# Altium PCB MergeBoard.PcbDoc
Units mil, origin at the board's own origin, x right, y up, seen from the top; angles counter-clockwise.
Board outline 4000 x 4000 mil, 4 copper layers (Top Layer, Mid-Layer 1, Mid-Layer 2, Bottom Layer); 113 components, 68 nets, 365 pads, 27 vias.
Unrouted connection lines stored in the file: 160.
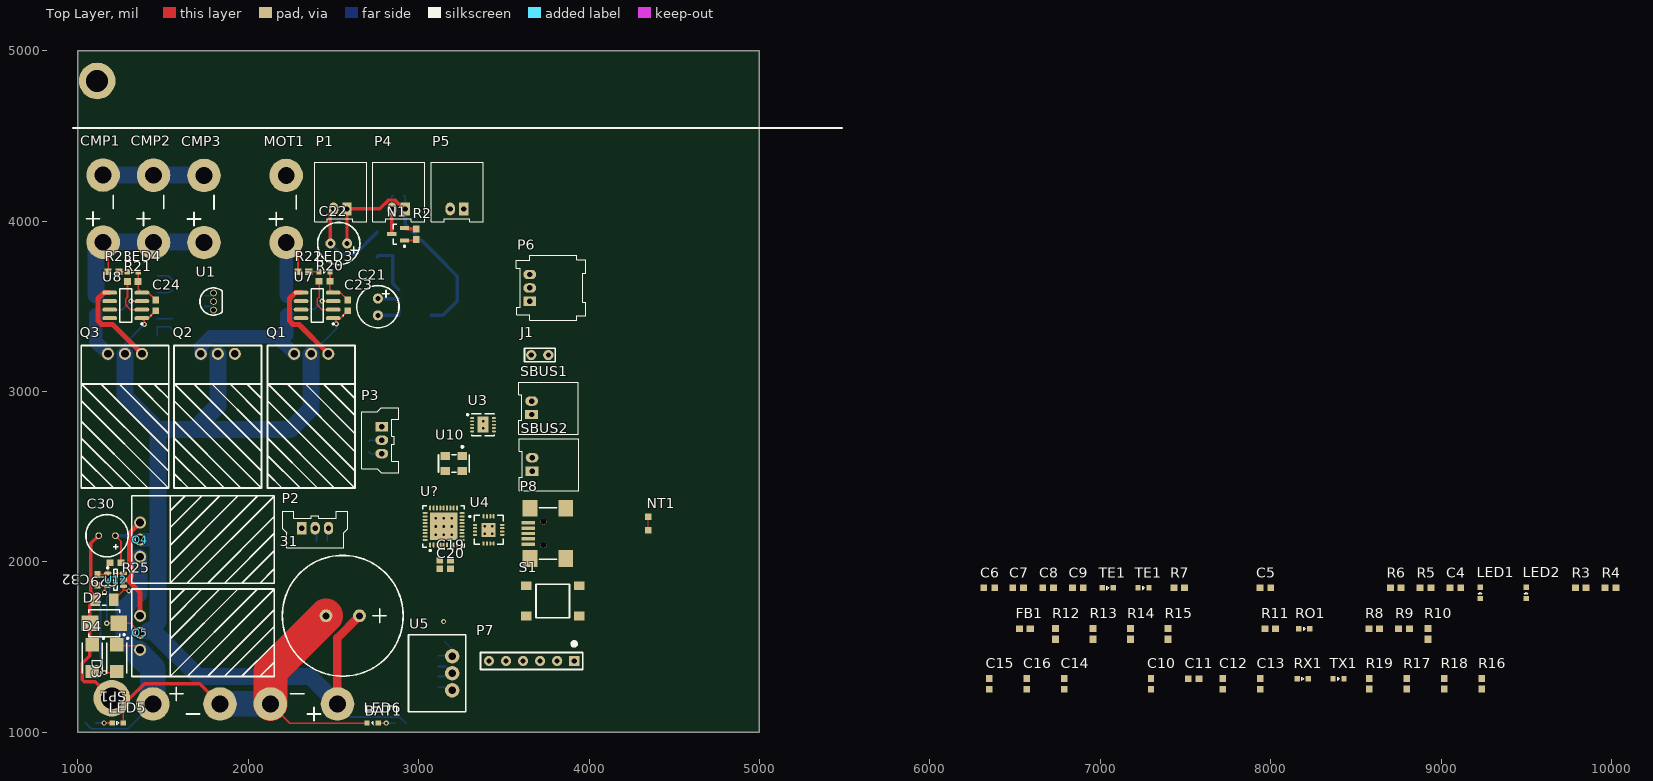
[diagram p0: Top Layer view]
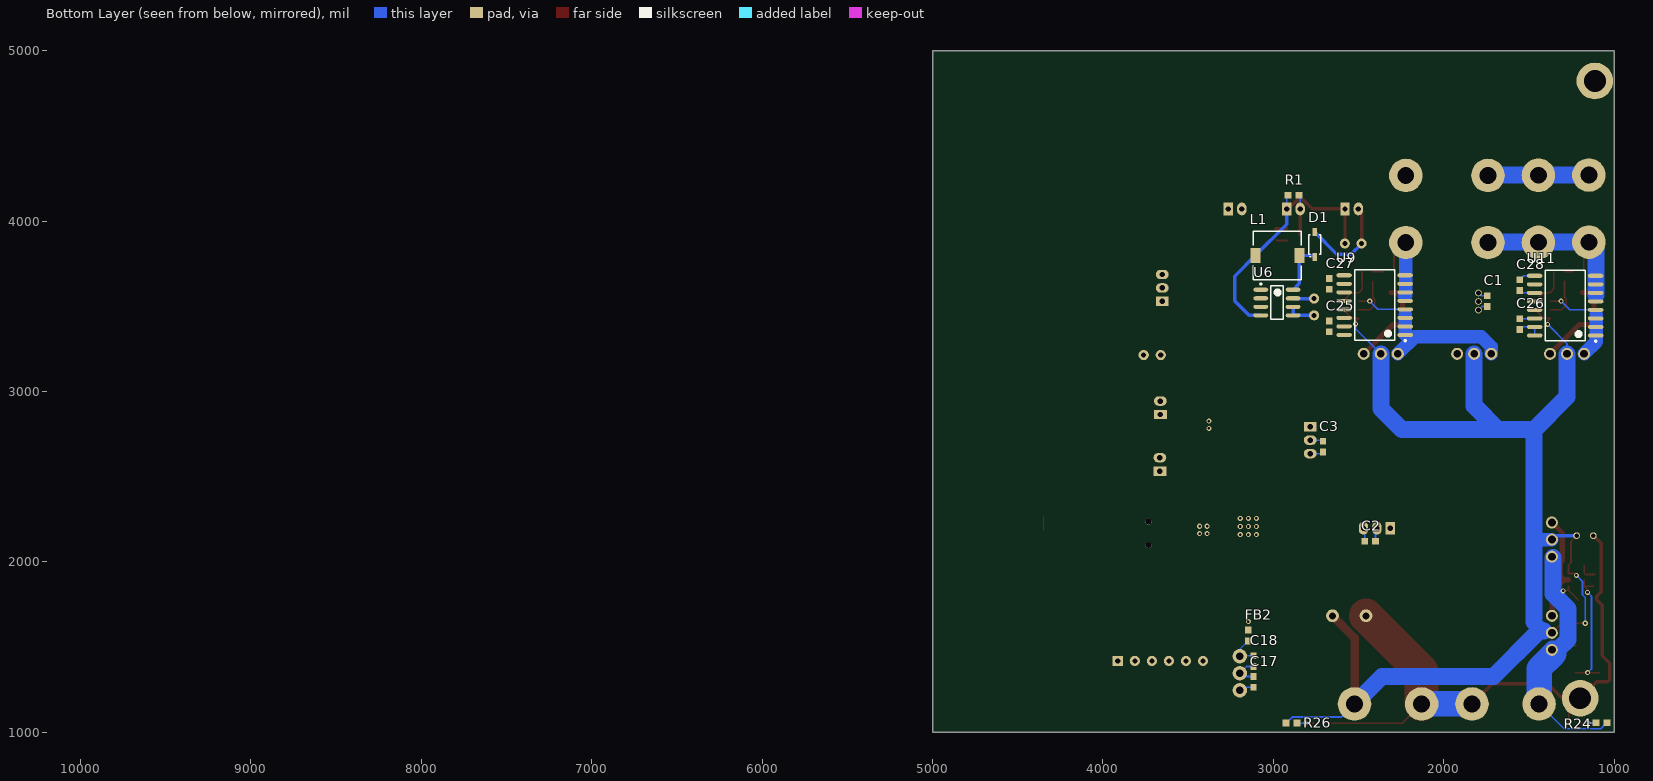
[diagram p1: Bottom Layer view, seen from below]

## Layer stack, top to bottom
Top Layer: signal copper 1.4
Dielectric: core 12.6, FR-4, Dk 4.8
Mid-Layer 1: signal copper 1.4
Dielectric: prepreg 12.6, FR-4, Dk 4.8
Mid-Layer 2: signal copper 1.4
Dielectric: core 12.6, FR-4, Dk 4.8
Bottom Layer: signal copper 1.4

## Board outline
1000,1000 5000,1000 5000,5000 1000,5000

## Design rules (kind name [scope] priority, off if disabled: settings)
Clearance [All] p1: gap=7
HoleSize [All] p1: absolutevalues=TRUE maxlimit=200 minlimit=15 maxpercent=80.000 minpercent=20.000
PolygonConnect [All] p1: connectstyle=Relief reliefconductorwidth=10 reliefentries=4 polygonreliefangle="90 Angle" airgapwidth=10
RoutingVias [All] p1: holewidth=15 width=30 viastyle="Through Hole" minholewidth=15 minwidth=30 maxholewidth=28 maxwidth=50
SilkscreenOverComponentPads SilkToSolderMaskClearance [IsPad] p1: minsilkscreentomaskgap=10
SolderMaskExpansion Blob [InNetClass('Blob')] p1: expansion=-3
SolderMaskExpansion [All] p2: expansion=3
Width [All] p1: maxlimit=200 minlimit=7 preferedwidth=7
26 further rules are at their usual default settings.

## Classes and differential pairs
component class Attachments: C1 C2 C3 N1 P1 P2 P3 P4 P5 P6 R1 R2 U1
component class CPU: C4 C5 C6 C7 C8 C9 C10 C11 C12 C13 C14 C15 C16 FB1 J1 LED1 LED2 P7 P8 R3 R4 R5 R6 R7 R8 R9 R10 R11 R12 R13 R14 R15 R16 R17 R18 R19 RO1 RX1 S1 SBUS1 SBUS2 TE1 TX1 U3 U4 U10 U?
component class PowerSplitter: C23 C24 C25 C26 C27 C28 CMP1 CMP2 CMP3 LED3 LED4 MOT1 Q1 Q2 Q3 R20 R21 R22 R23 U7 U8 U9 U11
component class Power: C17 C18 C19 C20 C21 C22 D1 FB2 L1 NT1 U5 U6
component class "Rail Station": 31 BAT1 C29 C30 C32 D2 D3 D4 LED5 LED6 Q4 Q5 R24 R25 R26 SP1 U12
net class Blob: MOTORS MT_PW RAIL+ SHORE+

## Components (designator, comment, footprint, x,y, rotation, side; value= is the part's Value field where it differs from the comment)
31 "CapPol" CAP1000uF 2555,1684 r180 top
BAT1 "BATWIRE" BATWIRE12 2524,1167 r180 top
C1 "Cap" CAPC0603 1745,3530 r270 bottom
C2 "Cap" CAPC0603 2432,2122 r180 bottom
C3 "Cap" CAPC0603 2709,2676 r90 bottom
C4 "Cap" CAPC0603 9083,1848 r0 top
C5 "Cap" CAPC0603 7968,1848 r0 top
C6 "Cap" CAPC0603 6348,1848 r0 top
C7 "Cap" CAPC0603 6518,1848 r0 top
C8 "Cap" CAPC0603 6693,1848 r0 top
C9 "Cap" CAPC0603 6868,1848 r0 top
C10 "Cap" CAPC0603 7297,1285 r90 top
C11 "Cap" CAPC0603 7547,1315 r0 top
C12 "Cap" CAPC0603 7717,1285 r90 top
C13 "Cap" CAPC0603 7937,1285 r90 top
C14 "Cap" CAPC0603 6787,1285 r90 top
C15 "Cap" CAPC0603 6347,1285 r90 top
C16 "Cap" CAPC0603 6567,1285 r90 top
C17 "Cap" CAPC0603 3117,1296 r90 bottom
C18 "Cap" CAPC0603 3117,1418 r270 bottom
C19 "Cap" CAPC0603 3156,2010 r0 top
C20 "Cap" CAPC0603 3156,1961 r0 top
C21 "CapPol" ELXZ500ELL680MF15D 2761,3545 r270 top
C22 "CapPol" UPW1E121MED 2581,3868 r180 top
C23 "CapPol" CAPP0603 2585,3505 r90 top
C24 "CapPol" CAPP0603 1457,3505 r90 top
C25 "Cap" CAPC0603 2672,3382 r270 bottom
C26 "Cap" CAPC0603 1555,3395 r270 bottom
C27 "Cap" CAPC0603 2673,3632 r90 bottom
C28 "Cap" CAPC0603 1555,3624 r90 bottom
C29 "Cap" CAPC1206 1157,1777 r180 top
C30 "CapPol" CAP22uF100V 1172,2154 r180 top
C32 "Cap" CAPC0603 1116,1895 r270 top
CMP1 "BATWIRE" BATWIRE12 1149,3876 r90 top
CMP2 "BATWIRE" BATWIRE12 1445,3875 r90 top
CMP3 "BATWIRE" BATWIRE12 1741,3874 r90 top
D1 "Schottky" 1N5819HW-7-F 2758,3863 r90 bottom
D2 "SMBJ60A-13-F" SMBJ60A-13-F 1156,1640 r180 top
D3 "SS16T3G" SS16T3G 1228,1436 r270 top
D4 "SS16T3G" SS16T3G 1086,1436 r270 top
FB1 "FBead" RES0603 6557,1608 r0 top
FB2 "FBead" RES0603 3147,1568 r270 bottom
J1 "Jumper" HEADER_MALE_1X2 3661,3214 r0 top
L1 "Inductor" SLF7045T-101MR50-PF 2977,3798 r0 bottom
LED1 "LED" LED0603 9228,1818 r90 top
LED2 "LED" LED0603 9498,1818 r90 top
LED3 "LED" LED0603 2448,3703 r0 top
LED4 "LED" LED0603 1323,3703 r0 top
LED5 "LED" LED0603 1235,1055 r0 top
LED6 "LED" LED0603 2730,1055 r180 top
MOT1 "BATWIRE" BATWIRE12 2223,3874 r90 top
N1 "NMOSFET" 2N7002P,215 2880,3923 r180 top
NT1 "NetTie" NT_5mil 4348,2226 r90 top net-tie
P1 "2-pin Horz Sherlock" MOLEX-HDR-1X2-SHERLOCK-HORZ 2580,4071 r0 top
P2 "MOLEX-HDR-1x3-SHERLOCK_VERT" MOLEX-HDR-1X3-SHERLOCK-VERT 2314,2198 r180 top
P3 "MOLEX-HDR-1x3-SHERLOCK_VERT" MOLEX-HDR-1X3-SHERLOCK-VERT 2784,2793 r90 top
P4 "2-pin Horz Sherlock" MOLEX-HDR-1X2-SHERLOCK-HORZ 2922,4071 r0 top
P5 "2-pin Horz Sherlock" MOLEX-HDR-1X2-SHERLOCK-HORZ 3264,4071 r0 top
P6 "3pos RA sherlock connector" MOLEX-HDR-1X3-SHERLOCK-RA 3652,3529 r270 top
P7 "SWD" SWD_STM32 3913,1419 r270 top
P8 "UX60-MB-5ST" UX60-MB-5ST 3733,2167 r90 top
Q1 "IRFB3306PbF" "TO-220AB Heatsink" 2370,3221 r180 top
Q2 "IRFB3306PbF" "TO-220AB Heatsink" 1822,3221 r180 top
Q3 "IRFB3306PbF" "TO-220AB Heatsink" 1277,3221 r180 top
Q4 "IRFB3306PbF" "TO-220AB Heatsink" 1366,2131 r270 top
Q5 "IRFB3306PbF" "TO-220AB Heatsink" 1366,1584 r270 top
R1 "Res" RES0603 2882,4152 r180 bottom
R2 "Res" RES0603 2986,3923 r90 top
R3 "Res" RES0603 9818,1848 r0 top
R4 "Res" RES0603 9993,1848 r0 top
R5 "Res" RES0603 8908,1848 r0 top
R6 "Res" RES0603 8733,1848 r0 top
R7 "Res" RES0603 7463,1848 r0 top
R8 "Res" RES0603 8607,1608 r0 top
R9 "Res" RES0603 8782,1608 r0 top
R10 "Res" RES0603 8922,1578 r90 top
R11 "Res" RES0603 7997,1608 r0 top
R12 "Res" RES0603 6737,1578 r90 top
R13 "Res" RES0603 6957,1578 r90 top
R14 "Res" RES0603 7177,1578 r90 top
R15 "Res" RES0603 7397,1578 r90 top
R16 "Res" RES0603 9237,1285 r90 top
R17 "Res" RES0603 8797,1285 r90 top
R18 "Res" RES0603 9017,1285 r90 top
R19 "Res" RES0603 8577,1285 r90 top
R20 "Res" RES0603 2448,3646 r0 top
R21 "Res" RES0603 1323,3645 r0 top
R22 "Res" RES0603 2324,3702 r0 top
R23 "Res" RES0603 1210,3703 r0 top
R24 "Res" RES0603 1075,1056 r0 bottom
R25 "Res" RES0603 1222,1996 r180 top
R26 "Res" RES0603 2894,1055 r180 bottom
RO1 "LED" LED0603 8197,1608 r0 top
RX1 "LED" LED0603 8187,1315 r0 top
S1 "Button" PTS645xxxxSMTR92 3787,1771 r180 top
SBUS1 "2-pin Horz Sherlock" MOLEX-HDR-1X2-SHERLOCK-HORZ 3663,2865 r270 top
SBUS2 "2-pin Horz Sherlock" MOLEX-HDR-1X2-SHERLOCK-HORZ 3666,2533 r270 top
SP1 "BATWIRE" BATWIRE12 1441,1167 r0 top
TE1 "LED" LED0603 7043,1848 r0 top
TE1 "LED" LED0603 7253,1848 r0 top
TX1 "LED" LED0603 8397,1315 r0 top
U1 "MCP9701" MCP970x-E/TO 1797,3528 r90 top
U3 "ISL3179EFRZ" ISL3179EFRZ 3378,2805 r0 top
U4 "FT230XQ-T" FT230XQ-T 3411,2188 r0 top
U5 "R-78C3.3-1.0" R-78C3.3-1.0 3197,1247 r90 top
U6 "LM2594M-12/NOPB" LM2594M-12/NOPB 2979,3522 r180 bottom
U7 "MIC5011" MIC5011 2405,3505 r180 top
U8 "MIC5011" MIC5011 1282,3505 r180 top
U9 "ACS710" ACS710 2406,3507 r0 bottom
U10 "636L3C008M" 636L3C 3207,2577 r180 top
U11 "ACS710" ACS710 1288,3504 r0 bottom
U12 "LM5050-1" LM5050 1222,1895 r0 top
U? "STM32F103TBU6" STM32F103TBU6 3147,2208 r90 top

## Footprints (in the part's own frame and the unit in brackets; to place one, negate y for a bottom-side part, rotate by r counter-clockwise, add the part's x,y. Pads: shape width x height; smd on the part's side, far side on the other; paste and mask are expansions set on the pad)
1N5819HW-7-F [mm] "DIODE SCHOTTKY 40V 1A SOD123"
  rect 1.2x0.7 smd: A(1.85,0) C(-1.85,0)
  silkscreen extent -1.9,-0.9 1.45,0.9, body extent -1.42,-0.85 1.43,0.85, height 1.35
2N7002P,215 [mm] "MOSFET N-CH SGL 60V SOT-23"
  rect 1.4x0.6 smd: 1(-0.95,0.95) 2(-0.95,-0.95) 3(0.95,0)
  silkscreen extent -1.08,-1.5 0.7,1.92, body extent -0.7,-1.5 0.7,1.5, height 1.1
636L3C [mm]
  rect 1.4x1.2 smd: 1(-1.27,-1.1) 2(1.27,-1.1) 3(1.27,1.1) 4(-1.27,1.1)
  silkscreen extent -2.3,-2.65 2.3,1.3
ACS710 [mm] "SOIC, 16-Leads, Body 10.5x7.6mm (max), Pitch 1.27mm, IPC Medium Density"
  oval 2.3x0.6 smd: 1(-4.55,4.445) 2(-4.55,3.175) 3(-4.55,1.905) 4(-4.55,0.635) 5(-4.55,-0.635) 6(-4.55,-1.905) 7(-4.55,-3.175) 8(-4.55,-4.445) 9(4.55,-4.445) 10(4.55,-3.175) 11(4.55,-1.905) 12(4.55,-0.635) 13(4.55,0.635) 14(4.55,1.905) 15(4.55,3.175) 16(4.55,4.445)
  silkscreen extent -4.67,-5.25 3,5.42, body extent -3.8,-5.25 3.8,5.25, height 2.65
BATWIRE12 [mm] "Two 12AWG wires soldered directly to the board"
  round 5 hole 2.5: +(0,0) -(10,0)
  silkscreen extent 2.5,-1.5 7,2.5
CAP22uF100V [mm] "CAP ALUM 22UF 100V 20% RADIAL"
  round 1 hole 0.65: 1(-1.25,0) 2(1.25,0)
  silkscreen extent -3.15,-3.15 3.15,3.15, body extent -3.12,-3.14 3.15,3.14, height 11.2
CAP1000uF [mm] "CAP ALUM 1000UF 50V 20% RADIAL"
  round 1.9 hole 1.05: 1(-2.5,0) 2(2.5,0)
  silkscreen extent -9,-9 9,9, body extent -8.93,-8.98 9,8.98, height 20
CAPC0603 [mm] "Chip Capacitor, 2-Leads, Body 1.60x0.80mm, IPC Medium Density"
  rect 1x0.95 smd: 1(-0.8,0) 2(0.8,0)
  body extent -0.88,-0.48 0.87,0.48, height 0.8
CAPC1206 [mm] "Chip Capacitor, 2-Leads, Body 3.20x1.60mm, IPC Medium Density"
  rect 1.4x1.85 smd: 1(-1.4,0) 2(1.4,0)
  silkscreen extent -0.3,-0.82 0.3,0.82, body extent -1.7,-0.9 1.7,0.9, height 1.8
CAPP0603 [mm] "Chip Capacitor, 2-Leads, Body 1.60x0.80mm, IPC Medium Density"
  rect 1x0.95 smd: 1(-0.8,0) 2(0.8,0)
  silkscreen extent -1.56,0.64 -1.46,0.74, body extent -0.88,-0.48 0.87,0.48, height 0.8
ELXZ500ELL680MF15D [mm] "CAP ALUM 68UF 50V 20% RADIAL"
  round 1.5 hole 0.75: 1(0,0) 2(2.5,0)
  silkscreen extent -1.95,-3.15 4.35,3.15, body extent -1.93,-3.14 4.35,3.14, height 15
FT230XQ-T [mm] "IC USB SERIAL BASIC UART 16QFN"
  oval 0.65x0.3 smd mask+0.07: 1(-2.025,0.75) 2(-2.025,0.25) 3(-2.025,-0.25) 4(-2.025,-0.75) 9(2.025,-0.75) 10(2.025,-0.25) 11(2.025,0.25) 12(2.025,0.75)
  oval 0.3x0.65 smd mask+0.07: 5(-0.75,-2.025) 6(-0.25,-2.025) 7(0.25,-2.025) 8(0.75,-2.025) 13(0.75,2.025) 14(0.25,2.025) 15(-0.25,2.025) 16(-0.75,2.025)
  rect 2.08x2.08 smd mask+0.07: 13(0,0)
  silkscreen extent -2.92,-2.15 2.15,2.15, body extent -2,-2 2,2, height 0.8
HEADER_MALE_1X2 [mil]
  round 60 hole 30: 1(0,0) 2(100,0)
  silkscreen extent -40,-40 140,40
ISL3179EFRZ [mm] "TXRX ESD 3.3V RS-485/422 10-DFN"
  oval 0.6x0.25 smd mask+0.07: 1(-1.615,1) 2(-1.615,0.5) 3(-1.615,0) 4(-1.615,-0.5) 5(-1.615,-1) 6(1.615,-1) 7(1.615,-0.5) 8(1.615,0) 9(1.615,0.5) 10(1.615,1)
  rect 1.64x2.38 smd mask+0.07: 11(0,0)
  silkscreen extent -2.42,-1.65 1.65,1.65, body extent -1.5,-1.5 1.5,1.5, height 0.9
LED0603 [mm] "Chip LED, 2-Leads, Body 1.60x0.80mm, IPC Medium Density"
  rect 0.8x0.8 smd: A(-0.825,0) C(0.825,0)
  silkscreen extent -0.13,-0.25 0.12,0.25, body extent -0.88,-0.48 0.87,0.47, height 0.8
LM2594M-12/NOPB [mm] "IC REG BUCK 12V 0.5A 8-SOIC"
  oval 2.2x0.6 smd: 1(-2.4,1.905) 2(-2.4,0.635) 3(-2.4,-0.635) 4(-2.4,-1.905) 5(2.4,-1.905) 6(2.4,-0.635) 7(2.4,0.635) 8(2.4,1.905)
  silkscreen extent -2.53,-2.5 0.9,2.88, body extent -2,-2.5 2,2.5, height 1.75
LM5050 [mm] "SOT23, 6-Leads, Body 2.90x2.80mm, Pitch 0.95mm, IPC Medium Density"
  oval 1.1x0.6 smd: 1(-1.175,0.95) 2(-1.175,0) 3(-1.175,-0.95) 4(1.175,-0.95) 5(1.175,0) 6(1.175,0.95)
  silkscreen extent -1.3,-1.55 0.25,1.92, body extent -0.87,-1.52 0.88,1.53, height 1.1
MCP970x-E/TO [mm] "Low-Power Linear Active Thermistor ICs"
  round 1 hole 0.8: 1(-1.27,0) 2(0,0) 3(1.27,0)
  silkscreen extent -2.03,-1.31 2.03,2.03, body extent -2.33,-2.35 2.35,2.35, height 5.3
MIC5011 [mm] "SOIC, 8-Leads, Body 4.90x3.90mm, Pitch 1.27mm, IPC Medium Density"
  oval 2.2x0.6 smd: 1(-2.4,1.905) 2(-2.4,0.635) 3(-2.4,-0.635) 4(-2.4,-1.905) 5(2.4,-1.905) 6(2.4,-0.635) 7(2.4,0.635) 8(2.4,1.905)
  silkscreen extent -2.53,-2.5 0.9,2.88, body extent -2,-2.5 2,2.5, height 1.63
MOLEX-HDR-1X2-SHERLOCK-HORZ [mm]
  rect 1.397x1.905 hole 0.8: 1(0,0)
  oval 1.397x1.905 hole 0.8: 2(-2,0)
  silkscreen extent -4.83,-1.91 2.92,6.98, body extent -4.83,-1.91 2.87,8.59, height 5.54
MOLEX-HDR-1X3-SHERLOCK-RA [mm]
  rect 1.397x1.905 hole 0.8: 1(0,0)
  oval 1.397x1.905 hole 0.8: 2(-2,0) 3(-4,0)
  silkscreen extent -6.86,-2.03 2.79,8.38, body extent -6.88,-1.99 2.82,8.51, height 5.75
MOLEX-HDR-1X3-SHERLOCK-VERT [mm]
  rect 1.397x1.905 hole 0.8: 1(0,0)
  oval 1.397x1.905 hole 0.8: 2(-2,0) 3(-4,0)
  silkscreen extent -6.85,-2.55 2.85,2.95, body extent -6.88,-2.57 2.82,2.98, height 8.57
NT_5mil [mm] "Thin Net Tie"
  rect 1x1 smd paste+0 mask+0: 1(-1,0) 2(1,0)
  Top Layer lines w0.127: -1,0 1,0
PTS645xxxxSMTR92 [mm] "PTS645 Series SMT 6 mm Tactile Switch"
  rect 1.555x1.3 smd: A(-3.975,2.25) A(3.975,2.25) B(-3.975,-2.25) B(3.975,-2.25)
  silkscreen extent -2.5,-2.5 2.5,2.5, body extent -3,-3 3,3, height 4.5
R-78C3.3-1.0 [mm] "CONV DC/DC 1A 3.3V OUT SIP VERT"
  round 2.15 hole 1.15: 1(0,0) 2(2.54,0) 3(5.08,0)
  silkscreen extent -3.21,-2 8.29,6.5, body extent -3.3,-2.03 8.38,6.6, height 10.4
RES0603 [mm] "Chip Resistor, 2-Leads, Body 1.60x0.80mm, IPC Medium Density"
  rect 1.05x1 smd: 1(-0.8,0) 2(0.8,0)
  body extent -0.88,-0.48 0.87,0.47, height 0.8
SLF7045T-101MR50-PF [mm] "INDUCTOR SHIELD PWR 100UH 7045"
  rect 1.5x2.2 smd: 1(-3.275,0) 2(3.275,0)
  silkscreen extent -3.6,-3.6 3.6,3.6, body extent -3.6,-3.6 3.6,3.6, height 4.8
SMBJ60A-13-F [mm] "TVS UNIDIRECT 600W 60V SMB"
  rect 2.5x2.3 smd: A(2.15,0) C(-2.15,0)
  silkscreen extent -3.08,-2 2.3,2, body extent -2.29,-1.97 2.28,1.97, height 2.62
SS16T3G [mm] "DIODE SCHOTTKY 60V 1A SMA"
  rect 2x2 smd: A(2,0) C(-2,0)
  silkscreen extent -3.07,-1.5 2.3,1.78, body extent -2.29,-1.46 2.28,1.46, height 2.2
STM32F103TBU6 [mm] "MCU ARM 32BIT 128KB 36VFQFPN"
  oval 0.75x0.3 smd mask+0.07: 1(-2.75,2) 2(-2.75,1.5) 3(-2.75,1) 4(-2.75,0.5) 5(-2.75,0) 6(-2.75,-0.5) 7(-2.75,-1) 8(-2.75,-1.5) 9(-2.75,-2) 19(2.75,-2) 20(2.75,-1.5) 21(2.75,-1) 22(2.75,-0.5) 23(2.75,0) 24(2.75,0.5) 25(2.75,1) 26(2.75,1.5) 27(2.75,2)
  oval 0.3x0.75 smd mask+0.07: 10(-2,-2.75) 11(-1.5,-2.75) 12(-1,-2.75) 13(-0.5,-2.75) 14(0,-2.75) 15(0.5,-2.75) 16(1,-2.75) 17(1.5,-2.75) 18(2,-2.75) 28(2,2.75) 29(1.5,2.75) 30(1,2.75) 31(0.5,2.75) 32(0,2.75) 33(-0.5,2.75) 34(-1,2.75) 35(-1.5,2.75) 36(-2,2.75)
  rect 4.1x4.1 smd mask+0.07: 37(0,0)
  silkscreen extent -3.7,-3.1 3.1,3.1, body extent -3.06,-3.06 3.06,3.06, height 1
SWD_STM32 [mil] "SWD connector matching the pinout on STM Discovery Boards"
  rect 60x60 hole 30: 1(0,0)
  round 60 hole 30: 2(0,-100) 3(0,-200) 4(0,-300) 5(0,-400) 6(0,-500)
  silkscreen extent -110,-550 50,50
"TO-220AB Heatsink" [mm] "HEXFET Power MOSFET w/ Heat Sink"
  round 1.8 hole 1.15: D(0,0) G(-2.54,0) S(2.54,0)
  silkscreen extent -6.53,-1.25 6.52,20, body extent -6.44,-0.15 6.36,19.9, height 12.7
UPW1E121MED [mm] "CAP ALUM 120UF 25V 20% RADIAL"
  round 1.5 hole 0.75: 1(0,0) 2(2.5,0)
  silkscreen extent -1.9,-3.15 4.4,3.15, body extent -1.92,-3.14 4.35,3.14, height 15
UX60-MB-5ST [mm] "USB Mini-B Recepticle"
  rect 0.5x2 smd: 1(-1.6,2.25) 2(-0.8,2.25) 3(0,2.25) 4(0.8,2.25) 5(1.6,2.25)
  rect 2.5x2.2 smd: SHD(-3.75,-3.3) SHD(-3.75,2) SHD(3.75,-3.3) SHD(3.75,2)
  round 0.9 hole 0.9 unplated: ""(-1.75,0) ""(1.75,0)
  silkscreen extent -3.85,-1.92 3.85,0.63

## Part data
BAT1 CMP1 CMP2 CMP3 MOT1 SP1: "Two large gauge leads soldered directly to the board."
D1: "Schottky Diode Template"
D2: "TVS UNIDIRECT 600W 60V SMB"
D3 D4: "DIODE SCHOTTKY 60V 1A SMA"
FB1 FB2: "Ferrite Bead"
J1: "Single Jumper on 1x2 Male Header"
N1: "NMOSFET Template"
NT1: "Ties two nets together"
P1 P4 P5 SBUS1 SBUS2: library part MOLEX-HDR-1x2-SHERLOCK_RA, "Header, Molex, 2mm Pitch Sherlock Header, Single Row, Horizontal, 2 Circuits, Length 3.3mm,  0353630260"
P2 P3: "Header, Molex, 2mm Pitch Sherlock Header, Single Row, Vertical, 3 Circuits, Length 3.3mm, 0353620376"
P6: library part MOLEX-HDR-1x3-SHERLOCK_RA, "Header, Molex, 2mm Pitch Sherlock Header, Single Row, Right Angle 3 Circuits, Length 3.3mm"
P7: library part SWD_STM32, "SWD connector matching the pinout on STM Discovery Boards"
P8: "USB Mini B Metal Shield SMT Type With Positioning Post"
Q1 Q2 Q3 Q4 Q5: library part IRFx3306PbF, "HEXFET Power MOSFET"
S1: "SPST Button"
U1: library part MCP970x, "Low-Power Linear Active Thermistor ICs"
U3: "TXRX ESD 3.3V RS-485/422 10-DFN"
U4: "IC USB SERIAL BASIC UART 16QFN"
U5: "CONV DC/DC 1A 3.3V OUT SIP VERT"
U6: "IC REG BUCK 12V 0.5A 8-SOIC"
U7 U8: "Minimum Parts High- or Low-Side MOSFET Driver"
U9 U11: "Current Sensor with Integrated Overcurrent Detection"
U10: library part 636L3C, "HCMOS/TTL Clock Oscillator"
U12: library part LM5050, "High-Side OR-ing FET Controller"
U?: "MCU ARM 32BIT 32K FLASH 36VFQFP"

## Free pads (board coordinates)
  round 215 hole 128.5: 1(1114,4822) 1(1200,1200)

## Via types
v1: diameter 30, hole 15, Top Layer to Bottom Layer, tented both sides, 11 vias
v2: diameter 30, hole 15, Top Layer to Bottom Layer, tented top, 10 vias
v3: diameter 30, hole 15, Top Layer to Bottom Layer, 6 vias

## Nets (pads, with @x,y where several pads share a name; then routed paths per layer and width w, separated by ;. In a path a pad name is that pad's centre, name@x,y a point inside that pad or via, vN(x,y) a via of type N, cw(c..) or ccw(c..) an arc to the next point about the centre after c; other vN are vias at no path point)
3V3: C1.2 C2.2 C3.2 C4.2 C6.1 C7.1 C8.1 C9.1 C16.1 C18.1 FB2.2 P2.2 P3.2 P6.1 P7.1 R3.1 R4.1 R6.1 R12.1 R13.1 R14.1 R15.1 U1.1 U3.10 U5.3 U10.1 U10.4 U?.1 U?.19 U?.27 | length 408.8
  Bottom Layer w7: FB2.2 3197,1486.5 U5.3 U5.3@3194.5,1449.5
  Bottom Layer w10: C1.2 1776.5,3498.5 U1.1 ; P2.2 2400.5,2190.24 C2.2 ; C3.2 2715.76,2714.26 P3.2 ; C18.1 U5.3@3194.5,1449.5
12V: C22.1 L1.2 P1.1 P4.1 R1.1 U6.4 | length 1528.1
  Top Layer w20: C22.1 2580,3869 P1.1 2773.16,4071 2825.66,4123.5 2860.86,4123.5 2913.36,4071 P4.1
  Bottom Layer w10: R1.1 2922,4143.5 P4.1
  Bottom Layer w20: P4.1 2922,3981.94 L1.2 3227,3676.94 3227,3531 3143,3447 U6.4
A3V3: C19.1 C20.1 C25.1 C26.1 FB2.1 U9.14 U11.14 U?.6 | length 88.9
  Bottom Layer w10: U11.14 1469.64,3426.5 C26.1
  other v1: 3147,1650
AGND: C19.2 C20.2 C25.2 C26.2 C27.2 C28.2 NT1.2 U9.9 U9.15 U9.16 U11.9 U11.15 U11.16 U?.5 | length 241.9
  Bottom Layer w10: U11.16 U11.15 1539.5,3379 C26.2 ; U11.9 1531.5,3679 C28.2
BOOT0: R5.1 U4.12 U?.35
BUZ_EN: N1.1 R2.1 U?.31 | length 71
  Top Layer w10: N1.1 2980.09,3885.6 R2.1
CLK8MHZ: U10.3 U?.2
CM_PW: Q3.S U8.3 U11.1 U11.2 U11.3 U11.4 | length 548.6
  Top Layer w10: v1(1312,3530) U8.3
  Bottom Layer w10: U11.4 1261,3479 v1(1312,3530)
  Bottom Layer w80: 1105,3451 1105,3293 Q3.S
CMP_EN: R21.1 U8.2 U?.32 | length 247
  Top Layer w10: R21.1 1291.5,3551.93 1282,3542.43 1282,3508 1310,3480 U8.2
CMP_I: U11.12 U?.12
COMP: CMP1.+ CMP2.+ CMP3.+ R23.1 U11.5 U11.6 U11.7 U11.8 | length 1101.6
  Top Layer w10: CMP1.+ 1178.5,3846.5 R23.1
  Bottom Layer w100: 1107,3567 1107,3834 CMP1.+ CMP3.+@1739,3876
DEBUG_CTS: R15.2 U4.4 U?.23
DEBUG_RTS: R14.2 U4.16 U?.24
DEBUG_RXI: R12.2 U4.15 U?.22
DEBUG_TXO: R13.2 U4.2 U?.21
GND: 31.2 BAT1.- C1.1 C2.1 C3.1 C4.1 C5.2 C6.2 C7.2 C8.2 C9.2 C10.2 C11.2 C12.2 C13.2 C15.2 C16.2 C17.2 C18.2 C21.2 C22.2 C23.2 C24.2 C29.2 C30.2 CMP1.- CMP2.- CMP3.- D1.A D2.A D4.C LED3.C LED4.C LED5.C LED6.C MOT1.- N1.2 NT1.1 P1.2 P2.3 P3.3 P6.3 P7.3 P8.5 P8.SHD pad.1@1200,1200 R2.2 R5.2 R7.2 R8.2 R9.2 R10.2 R20.2 R21.2 S1.A SP1.- U1.3 U3.2 U3.6 U4.3 U4.13 U5.2 U6.5 U6.6 U7.4 U8.4 U10.2 U?.18 U?.26 U?.36 | length 5845.3
  Top Layer w10: pad.1@1200,1200 1267.48,1132.52 LED5.C ; LED4.C 1355.48,3645.98 R21.2 1354.5,3601.99 U8.4 1413.5,3580 C24.2 ; BAT1.- 2243.72,1053.57 2696.09,1053.57 LED6.C ; LED3.C 2480.48,3646.98 R20.2 2479.5,3599.99 U7.4 2541.5,3580 C23.2 ; N1.2 N1.2@2923.31,3954.5
  Top Layer w20: C30.2 1077.3,2108.51 1077.3,1823.82 1101.88,1799.24 C29.2 1071.35,1746.47 D2.A 1071.35,1449.64 1026.63,1404.91 1026.63,1309.61 1038.35,1297.89 1102.11,1297.89 1200,1200 1306.52,1200 1391.95,1285.43 1716.28,1285.43 SP1.- ; C22.2 2482.57,4052.32 P1.2 ; N1.2@2923.31,3954.5 R2.2
  Top Layer w200: BAT1.- 2130.3,1357.72 31.2
  Bottom Layer w10: C1.1 1780.5,3561.5 U1.3 ; C2.1 2463.5,2190.02 P2.3 ; C3.1 2717.98,2635.52 P3.3 ; C17.2 3177.5,1327.5 U5.2 3157.5,1386.5 C18.2
  Bottom Layer w20: C22.2 2544.57,3806 2628.17,3806 D1.A ; C21.2 U6.5@2884.09,3446.57 ; U6.5 U6.6
  Bottom Layer w100: CMP1.- CMP3.-@1739,4269.7
  Bottom Layer w150: SP1.- BAT1.-
  other v3: 3389.35,2166.35 3432.65,2166.35 3389.35,2209.65 3432.65,2209.65
LED1: LED1.C U?.33
LED2: LED2.C U?.34
MOT_EN: R20.1 U7.2 U?.17 | length 248.9
  Top Layer w10: R20.1 2416.5,3553.93 2405,3542.43 2405,3508 2433,3480 U7.2
MOT_I: U9.12 U?.11
MOTORS: MOT1.+ R22.1 U9.5 U9.6 U9.7 U9.8 | length 517.9
  Top Layer w10: MOT1.+ 2292.5,3804.5 R22.1
  Bottom Layer w80: MOT1.+ 2223,3564 2228,3559
MT_PW: Q1.S Q2.S U7.3 U9.1 U9.2 U9.3 U9.4 | length 1066.5
  Top Layer w10: v1(2435,3530) U7.3
  Bottom Layer w10: U9.4@2227,3482 2387,3482 v1(2435,3530)
  Bottom Layer w80: Q2.S 1722,3262.42 1780.58,3321 2170,3321 Q1.S ; U9.1@2227,3332 2227,3451
NetC10_1: C10.1 FB1.2 P8.1
NetC11_1: C11.1 P8.2 R16.1
NetC12_1: C12.1 P8.3 R19.1
NetC13_1: C13.1 FB1.1 U4.10
NetC14_1: C14.1 U4.14
NetC27_1: C27.1 U9.11
NetC28_1: C28.1 U11.11 | length 93.5
  Bottom Layer w10: U11.11 1535,3579 1548.5,3592.5 C28.1
NetC32_1: C32.1 R25.2 U12.1 | length 111
  Top Layer w10: C32.1 1169.83,1926.5 U12.1 R25.2@1175.74,1981.24
NetC32_2: C32.2 D3.A D4.A U12.2 U12.3 | length 767
  Top Layer w10: D4.A@1086,1350.26 v1(1156,1350.26) D3.A@1228,1350.26 ; C32.2@1121.91,1857.6 U12.3 ; v1(1157,1821) 1157,1838.86 U12.3 ; U12.2 U12.3
  Bottom Layer w10: v1(1156,1350.26) 1134,1372.26 1134,1798 v1(1157,1821)
NetD1_C: D1.C L1.1 U6.8 | length 318.2
  Bottom Layer w10: D1.C D1.C@2766.83,3790.17
  Bottom Layer w20: D1.C 2765.83,3798 L1.1 2848.06,3633.45 U6.8
NetJ1_1: J1.1 R11.1
NetJ1_2: J1.2 SBUS1.1 SBUS2.1 U3.8
NetLED1_A: LED1.A R3.2
NetLED2_A: LED2.A R4.2
NetLED3_A: LED3.A R22.2 | length 60.4
  Top Layer w10: R22.2 2414.52,3702 LED3.A
NetLED4_A: LED4.A R23.2 | length 49
  Top Layer w10: R23.2 LED4.A
NetLED5_A: LED5.A R24.2 | length 96.4
  Top Layer w10: v1(1155,1055) LED5.A
  Bottom Layer w10: R24.2 1107.5,1055 v1(1155,1055)
NetLED6_A: LED6.A R26.2 | length 100.9
  Top Layer w10: LED6.A 2763.48,1054 v1(2810,1054)
  Bottom Layer w10: v1(2810,1054) 2861.5,1054 R26.2
NetN1_3: N1.3 P4.2 R1.2 | length 232.3
  Top Layer w20: N1.3 2842.6,4070.34 P4.2
  Bottom Layer w10: P4.2 2843.26,4144.76 R1.2
NetQ1_G: Q1.G Q2.G U7.5 | length 521.2
  Top Layer w30: U7.5 2276.96,3580 2242.2,3545.25 2242.2,3414.75 2263.77,3393.19 2297.81,3393.19 Q1.G
NetQ3_G: Q3.G U8.5 | length 551.2
  Top Layer w30: U8.5 1153.96,3580 1119.2,3545.25 1119.2,3414.75 1140.77,3393.19 1204.81,3393.19 Q3.G
NetQ4_G: Q4.G Q5.G U12.5 | length 664.4
  Top Layer w30: Q5.G 1366,1821.76 1293.35,1894.41 1268.85,1894.41 U12.5 1268.85,1895.59 1293.35,1895.59 1314.91,1917.15 1314.91,1996.62 1305.57,2005.97 1305.57,2170.57 Q4.G
NetR7_1: R7.1 RO1.C
NetR8_1: R8.1 TE1.C@7285.48,1848
NetR10_1: R10.1 TE1.C@7075.48,1848
NetR11_2: R11.2 SBUS1.2 SBUS2.2 U3.7
NetR16_2: R16.2 U4.7
NetR17_2: R17.2 RX1.A
NetR18_2: R18.2 TX1.A
NetR19_2: R19.2 U4.6
NetRX1_C: RX1.C U4.11
NetTX1_C: TX1.C U4.5
NRST: C5.1 C14.2 P7.5 R6.2 S1.B U?.4
PWR_ON: P6.2 U?.7
RAIL+: 31.1 BAT1.+ C17.1 C21.1 C23.1 C24.1 C30.1 D2.C Q1.D Q2.D Q3.D Q4.D Q5.D R25.1 R26.1 U5.1 U6.7 U7.1 U8.1 U12.6 | length 7812.3
  Top Layer w10: v1(1170,1640) D2.C 1310,1640 Q5.D ; C30.1 1253.5,2121.72 R25.1 1268.26,1981.24 U12.6 1233.4,1932.4 v1(1222,1921) ; v1(1391,3394) 1391,3415.49 U8.1 1413.5,3430 C24.1 ; v1(2518,3397) 2518,3411.49 U7.1 2541.5,3430 C23.1
  Top Layer w50: BAT1.+ 2524,1554.57 31.1
  Bottom Layer w10: v1(1170,1640) 1170,1791.57 1187,1808.57 1187,1886 v1(1222,1921) ; Q3.D 1277,3280 v1(1391,3394) ; Q4.D@1343,2154 Q4.D ; Q1.D 2518,3369 v1(2518,3397) ; BAT1.+ 2601.31,1089.69 2889.39,1089.69 2924.07,1055 R26.1 ; C17.1 U5.1@3179.5,1264.5
  Bottom Layer w20: C30.1 Q4.D@1343,2154 ; C21.1 U6.7@2882.51,3545
  Bottom Layer w50: Q5.D 1452,1584
  Bottom Layer w80: Q4.D 1426,2131 ; 1415.3,1594.3 1470,1649
  Bottom Layer w100: Q3.D 1277,2969 1470,2776 ; 1411.26,1594.3 1415.3,1594.3 ; 1452,1584 1708,1328 2363,1328 BAT1.+ ; 1470,1649 1470,2776 ; Q2.D 1822,2916 1682,2776 ; Q1.D 2370,2900 2246,2776 1682,2776 ; 1470,2776 1682,2776
SHORE+: C29.1 D3.C Q4.S Q5.S R24.1 SP1.+ U12.4 | length 1761.5
  Top Layer w10: C29.1 1268.26,1833.14 ; D3.C@1228,1507.74 1342.26,1507.74 Q5.S ; U12.4 1268.26,1833.14 ; v2(1300,1830) 1296.86,1833.14 1268.26,1833.14
  Bottom Layer w10: R24.1 1044.93,1056 1079.61,1021.31 1295.31,1021.31 SP1.+
  Bottom Layer w80: Q4.S@1360,2025 Q4.S
  Bottom Layer w100: Q5.S@1354,1461 1354,1472 Q5.S 1361.43,1488.57 1326.47,1488.57 1270.57,1544.47 1270.57,1723.53 1360,1812.96 Q4.S@1360,2025
  Bottom Layer w150: Q5.S@1354,1461 1441,1374 SP1.+
SUBBUS_RXI: RO1.A U3.1 U?.10
SUBBUS_TE: R9.1 U3.3 U?.8
SUBBUS_TXO: TE1.A U3.4 U?.9
SWCLK: P7.2 U?.28
SWDIO: P7.4 U?.25
SWO: P7.6 U?.30
TEMP_AMB: U1.2 U?.13
TEMP_HOTSWAP: P2.1 U?.14
TEMP_MOTFET: P3.1 U?.15
U3V3: C15.1 R17.1 R18.1 U4.1 U4.8 U4.9
pads on no net: P5.1 P5.2 P8. P8.4 U3.5 U3.9 U3.11 U6.1 U6.2 U6.3 U7.6 U7.7 U7.8 U8.6 U8.7 U8.8 U9.10 U9.13 U11.10 U11.13 U?.3 U?.16 U?.20 U?.29 U?.37
copper on no net:
  other v2: 3099.76,2160.76 3147,2160.76 3194.24,2160.76 3099.76,2208 3147,2208 3194.24,2208 3099.76,2255.24 3147,2255.24 3194.24,2255.24
  other v3: 3378,2783.35 3378,2826.65

## Silkscreen, mask and mechanical layers (free items; w line width, h text height)
Top Overlay:
  lines w10: 970,4546 5485,4546